# Altium PCB uku20710_proc.PcbDoc (part 3 of 3)
Units mm, origin at the board's own origin, x right, y up, seen from the top; angles counter-clockwise.
Board outline 354.7 x 156.7 mm, 4 copper layers (Top Layer, MidLayer1, MidLayer2, Bottom Layer); 269 components, 535 nets, 989 pads, 584 vias.
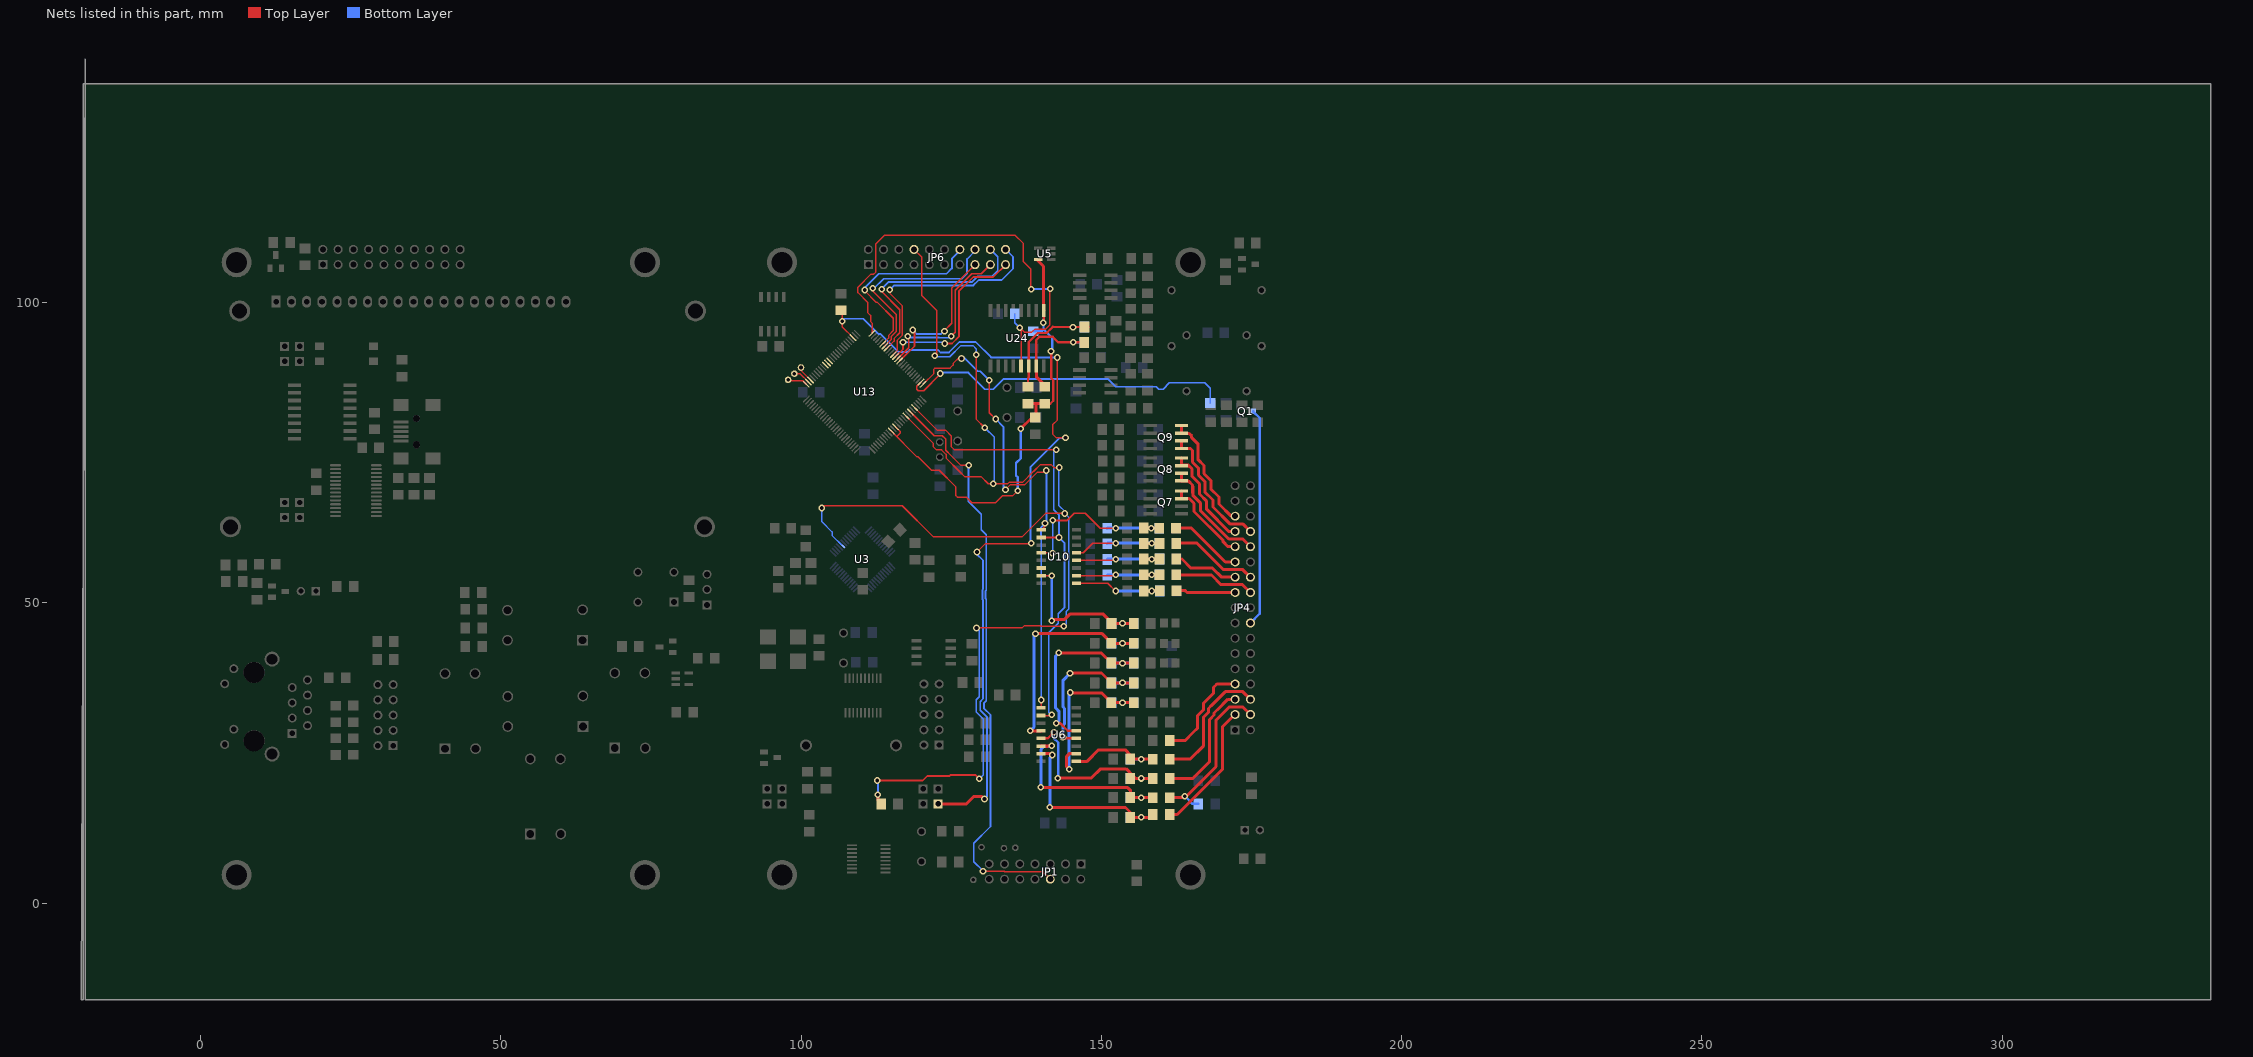
[diagram p3: the nets of this part, all layers, seen from the top]

## Via types
v1: diameter 1.1, hole 0.6, Top Layer to Bottom Layer, 508 vias
v2: diameter 1.2, hole 0.7, Top Layer to Bottom Layer, 56 vias
v3: diameter 1.5, hole 1, Top Layer to Bottom Layer, 16 vias
v4: diameter 1.27, hole 0.711, Top Layer to Bottom Layer, 2 vias
v5: diameter 1.2, hole 0.6, Top Layer to Bottom Layer, 1 vias
v6: diameter 1.1, hole 0.7, Top Layer to Bottom Layer, 1 vias

## Nets (pads, with @x,y where several pads share a name; then routed paths per layer and width w, separated by ;. In a path a pad name is that pad's centre, name@x,y a point inside that pad or via, vN(x,y) a via of type N, cw(c..) or ccw(c..) an arc to the next point about the centre after c; other vN are vias at no path point) (continued)
P1_23: JP6.15 U13.37 | length 25.4
  Top Layer w0.25: v1@123.774,95.25 123.799,95.275 125.074,96.55 125.074,96.65
  Top Layer w0.3: U13.37@116.408,90.276 118.874,92.743 118.874,95.25 118.652,95.472 v1@118.524,95.6 ; 125.074,96.65 125.074,102.42 JP6.15@128.954,106.3
  Bottom Layer w0.3: v1@118.524,95.6 v1@118.574,95.55 ; v1@118.574,95.4 118.577,95.397 119.224,94.75 123.274,94.75 v1@123.774,95.25
  other v1: 123.874,95.2 118.603,95.423
P1_24: JP6.17 U13.38 | length 27
  Top Layer w0.25: v1(124.974,94.35) 125.674,95.05 125.674,95.85
  Top Layer w0.3: U13.38@116.055,90.63 117.924,92.5 v1@117.924,94.15 ; 125.674,95.85 125.674,102.05 128.424,104.8 129.994,104.8 JP6.17@131.494,106.3
  Bottom Layer w0.25: 122.974,94.15 124.774,94.15 v1(124.974,94.35)
  Bottom Layer w0.3: v1@117.924,94.15 122.974,94.15
  other v1: 117.752,94.373
P1_25: 
P1_25: 
P1_25: 
P1_25: 
P1_25: 
P1_25: JP6.19 U13.39 | length 29.9
  Top Layer w0.3: U13.39@115.701,90.984 116.974,92.257 v1(116.952,93.372) ; v1(123.904,93.172) 125.124,93.172 126.274,94.323 126.274,101.85 128.674,104.25 131.984,104.25 JP6.19@134.034,106.3
  Bottom Layer w0.3: v1(116.952,93.372) 123.704,93.372 v1(123.904,93.172)
P1_26: JP6.20 U13.40 | length 38
  Top Layer w0.25: v1(114.774,102.15) 114.774,101.5 116.874,99.4 116.874,94.6 116.024,93.75 116.024,92.014 U13.40@115.347,91.337
  Bottom Layer w0.3: v1(114.774,102.15) 115.474,102.85 128.674,102.85 129.574,103.75 133.374,103.75 135.274,105.65 135.274,107.6 JP6.20@134.034,108.84
P1_27: JP6.18 U13.43 | length 36.9
  Top Layer w0.25: v1@113.324,101.9 116.424,98.8 116.424,94.95 115.474,94 115.474,93.586 U13.43@114.287,92.398 ; U13.43@114.124,92.25 U13.43@114.28,92.405
  Bottom Layer w0.3: v1@113.324,101.9 113.324,102.176 113.324,102.2 113.351,102.227 114.524,103.4 128.424,103.4 129.374,104.35 131.774,104.35 132.724,105.3 132.724,107.61 JP6.18@131.494,108.84
  other v1: 113.403,102.176
P1_28: JP6.16 U13.44 | length 33.2
  Top Layer w0.25: v1@111.874,102.1 111.874,101.95 115.874,97.95 115.874,95.2 115.804,95.13 115.804,95.122 115.002,94.319 115.002,93.82 U13.44@113.933,92.751
  Bottom Layer w0.3: v1@111.874,102.1 112.05,102.276 113.724,103.95 126.724,103.95 127.624,104.85 127.624,107.25 128.954,108.58 JP6.16@128.954,108.84
  other v1: 111.951,102.375
P1_29: 
P1_29: 
P1_29: 
P1_29: 
P1_29: JP6.14 U13.45 | length 31.9
  Top Layer w0.25: v1@110.3,102.375 110.3,102.225 110.526,102 112.501,100.024 112.701,100.024 115.352,97.373 115.352,95.323 114.552,94.523 114.552,94.077 U13.45@113.58,93.105
  Bottom Layer w0.3: v1@110.501,102.375 112.901,104.775 124.204,104.775 125.104,105.675 125.104,107.276 126.414,108.586 JP6.14@126.414,108.84
  other v1: 110.601,102.075
P1_30: U6.10 U10.10 U13.21 | length 78.8
  Top Layer w0.25: U13.21@118.883,82.498 122.631,78.75 124.024,78.75 124.974,77.8 124.974,76 125.474,75.5 v1(142.474,75.5) ; U6.10@139.954,31.218 139.972,31.2 141.702,31.2 v1@141.76,31.258
  Top Layer w0.3: U10.10@139.999,60.875 v1@142.95,60.875
  Bottom Layer w0.3: v1@141.76,31.258 141.224,31.793 141.224,44.976 142.81,46.562 142.81,48.198 143.874,49.262 143.874,59.901 v1@142.96,60.815 ; v1(142.474,75.5) 142.074,75.1 142.074,65.502 142.924,64.652 v1@142.924,60.815
  other v1: 141.76,31.358 142.935,60.875
P1_31: R22.1 U13.20 | length 108.1
  Top Layer w0.25: U13.20@118.529,82.145 122.405,78.27 123.755,78.27 124.505,77.519 124.505,75.769 125.557,74.718 127.832,74.718 v1(128.032,74.518)
  Top Layer w0.3: R22.1@104.133,19.042 109.666,19.042 112.129,21.505 120.43,21.505 120.68,21.755 124.481,21.755 124.631,21.906 131.933,21.906 132.183,21.655 ; v1(131.357,32.908) 133.358,30.908 v1(136.508,30.908) ; 132.183,21.655 133.457,20.381 v1(135.934,20.381)
  Bottom Layer w0.3: v1(128.032,74.518) 128.882,73.667 128.882,72.443 128.406,71.967 128.406,67.217 130.657,64.966 130.657,62.516 131.357,61.815 131.357,51.963 131.157,51.763 131.157,50.913 131.357,50.713 v1(131.357,32.908) ; v1(135.934,20.381) 136.558,21.005 136.558,22.706 135.958,23.306 135.958,30.358 v1(136.508,30.908)
P1_31: 
P1_31: 
P1_31: 
P1_31: 
P1_31: 
P1_31: 
P1_31: 
P1_31: 
P1_31: 
P1_31: 
P1_31: 
P1_31: 
P1_31: 
P2_0: U13.75 X13.1 | length 3.3
  Top Layer w0.25: X13.1@97.825,87.121 97.975,86.971 100.268,86.971 U13.75@100.852,86.387
P2_1: U13.74 X14.1 | length 2.9
  Top Layer w0.25: X14.1@98.875,88.15 99.797,88.15 U13.74@101.205,86.741
P2_2: U13.73 X15.1 | length 2.7
  Top Layer w0.25: X15.1@99.971,89.171 99.972,88.682 U13.73@101.559,87.095
P2_7: U13.66
P2_8: U13.65
P2_9: U13.64
P2_10: R9.2 U13.53 X20.1 | length 142.3
  Top Layer w0.25: R9.2@106.7,98.724 106.874,98.549 v1(106.874,96.9) 106.824,96.85 106.824,95.971 U13.53@108.63,94.166 ; v1(129.274,58.45) 130.624,59.8 v1@138.274,59.8 ; v1(142.674,90.85) 142.674,80.45 141.874,79.65 141.874,78.1 142.524,77.45 v1(144.024,77.45)
  Top Layer w0.5: X20.1@122.822,16.5 127.502,16.5 128.706,17.704 130.107,17.704 v2(130.507,17.304)
  Bottom Layer w0.3: v1(106.874,96.9) 107.274,97.3 110.324,97.3 112.851,94.773 113.201,94.773 116.202,91.772 117.752,91.772 118.052,92.072 122.804,92.072 123.204,91.672 124.604,91.672 126.355,93.422 129.055,93.422 131.628,90.85 v1(142.674,90.85) ; v1(129.274,58.45) 129.274,58.05 130.274,57.05 130.274,52.238 130.197,52.161 130.197,50.515 130.274,50.438 130.274,34 129.824,33.55 129.824,32.1 130.924,31 130.924,17.722 v2(130.507,17.304) ; v1@138.274,59.8 138.174,59.9 138.174,72.55 143.074,77.45 v1(144.024,77.45)
  other v1: 138.309,59.915
P2_13: R97.1 U13.50 U24.5 | length 74.9
  Top Layer w0.25: U13.50@111.812,94.873 111.812,96.565 111.552,96.824 111.552,97.847 111.124,98.275 111.124,99.975 109.452,101.648 109.452,102.55 111.628,104.726 112.102,104.726 112.452,105.076 112.452,109.778 113.853,111.178 135.658,111.178 137.009,109.828 137.009,106.777 138.259,105.526 v1@138.259,102.276 ; v1(136.408,95.824) v1@136.609,95.623 ; U24.5@136.609,89.425 v1@136.609,95.623 ; v1(141.46,102.276) 141.36,102.176 141.36,96.224 140.659,95.524 138.859,95.524 138.409,95.074 137.159,95.074 v1@136.609,95.623
  Bottom Layer w0.3: R97.1@135.57,98.118 135.57,96.662 v1(136.408,95.824) ; v1(138.309,102.226) v1@141.41,102.226
P3_25: R84.1 U13.27 | length 57.5
  Top Layer w0.25: U13.27@119.944,86.741 119.254,86.051 119.254,85.571 119.504,85.321 120.404,85.321 123.155,88.072 v1(123.155,88.172)
  Bottom Layer w0.3: v1(123.155,88.172) 123.305,88.322 127.856,88.322 130.607,85.571 132.007,85.571 133.708,87.272 151.062,87.272 152.362,85.972 159.164,85.972 159.564,85.571 160.264,85.571 161.315,86.622 167.216,86.622 168.113,85.725 R84.1@168.113,83.268
P3_26: U6.9 U10.9 U13.26 | length 84.3
  Top Layer w0.25: U13.26@120.297,86.387 122.103,88.194 122.103,88.921 122.253,89.071 124.804,89.071 125.304,89.571 125.304,89.821 126.355,90.872 126.705,90.872 v1@126.905,90.872 ; v1(131.324,87.05) 131.324,81.65 v1(132.374,80.6) ; v1@133.89,68.85 v1(134.024,68.85) 134.791,69.616 137.185,69.616 139.335,71.767 v1@140.835,71.767 ; U6.9@139.954,32.488 139.954,33.48 v1@139.974,33.5 ; U10.9@139.999,62.145 140.609,62.755 v1(140.609,63.216)
  Bottom Layer w0.3: v1@126.905,90.872 127.053,90.872 129.374,88.55 129.824,88.55 v1(131.324,87.05) ; v1(132.374,80.6) 133.674,79.3 133.674,69.05 133.949,68.775 v1@134.074,68.65 ; 139.959,61.315 139.959,62.566 140.835,63.442 v1@140.835,71.767 ; v1@139.974,33.5 139.974,33.808 139.974,61.9
  other v1: 140.009,33.808 140.835,72.017 126.705,90.672
PB1: 
PB1: 
PB2: 
PB2: 
PB3: 
PB3: 
PE6: 
PE6: 
PE7: 
PQ3: 
PQ4: 
PQ5: 
PQ6: 
PROG0: 
PROG1: 
PROG1: 
PROG1: 
PWM1: 
PWM2: 
REL1: JP4.24 Q7.5 Q7.6 | length 17.1
  Top Layer w0.5: Q7.6@163.336,66.07 Q7.5@163.336,64.8 163.336,64.788 Q7.5@164.236,64.788 ; Q7.5@163.824,64.9 163.824,64.85 164.624,64.85 169.374,60.1 169.374,59.25 170.574,58.05 173.554,58.05 JP4.24@174.814,56.79
REL1: 
REL2: JP4.25 Q7.7 Q7.8 | length 14.4
  Top Layer w0.5: Q7.8@163.336,68.61 Q7.7@163.336,67.34 163.348,67.35 164.624,67.35 165.424,66.55 165.424,65.2 170.274,60.35 170.274,60.15 171.094,59.33 JP4.25@172.274,59.33
REL3: JP4.26 Q8.5 Q8.6 | length 20.1
  Top Layer w0.5: Q8.6@163.324,71.565 Q8.5@163.324,70.295 163.327,70.297 163.374,70.25 164.524,70.25 165.174,69.6 165.174,68.3 ; 165.224,69.4 165.224,67.9 166.474,66.65 166.474,65.35 171.224,60.6 173.544,60.6 JP4.26@174.814,59.33
REL4: JP4.27 Q8.7 Q8.8 | length 17.3
  Top Layer w0.5: Q8.8@163.324,74.105 Q8.7@163.324,72.835 163.389,72.9 164.474,72.9 165.074,72.3 165.074,71.05 166.324,69.8 166.324,68.1 167.524,66.9 167.524,65.55 171.204,61.87 JP4.27@172.274,61.87
REL5: JP4.28 Q9.5 Q9.6 | length 22
  Top Layer w0.5: Q9.5@163.324,75.695 Q9.5@163.324,75.7 ; Q9.6@163.324,76.965 Q9.5@163.324,75.7 ; JP4.28@174.814,61.87 173.534,63.15 171.374,63.15 168.574,65.95 168.574,67.1 167.224,68.45 167.224,70.2 166.174,71.25 166.174,72.4 165.174,73.4 165.174,75.35 164.824,75.7 Q9.5@163.324,75.7
REL6: JP4.29 Q9.7 Q9.8 | length 20
  Top Layer w0.5: Q9.8@163.324,79.505 Q9.7@163.324,78.235 163.317,78.242 163.274,78.2 163.324,78.2 164.624,78.2 165.024,77.8 165.024,77.5 166.124,76.4 166.124,73.8 167.074,72.85 167.074,71.5 168.224,70.35 168.224,68.95 169.574,67.6 169.574,66.45 171.614,64.41 JP4.29@172.274,64.41
REL7: JP4.16 Q1.3 | length 36.3
  Bottom Layer w0.4: JP4.16@174.814,46.63 176.368,48.184 176.368,80.77 Q1.3@175.268,81.871
RES: D1.1 JP6.8 U3.29 U13.17 | length 225.8
  Top Layer w0.25: v1(103.452,65.785) 103.852,66.185 ; v1@103.814,66.147 116.822,66.147 121.955,61.015 136.84,61.015 140.691,64.866 v1@143.96,64.866 ; U13.17@117.469,81.084 122.024,76.528 122.024,75.95 122.524,75.45 123.374,75.45 124.124,74.7 124.124,74.1 126.337,71.888 127.207,71.018 129.939,71.018 131.14,69.817 v1(131.957,69.817) ; JP6.8@118.794,108.84 120.074,107.56 120.074,101.15 122.574,98.65 v1@122.574,91.25 ; v1(129.124,91.3) 129.124,80.6 v1(130.574,79.15) ; v2(129.207,45.8) v2@129.307,45.8 ; v2@129.318,45.811 130.407,45.811 ; 130.407,45.8 136.774,45.8 137.174,46.2 139.824,46.2 139.974,46.05 v1@143.76,46.05 ; v1@131.774,69.8 134.366,69.8 134.613,70.046 136.856,70.046 138.731,71.921 ; 138.735,71.917 139.834,73.016 141.587,73.016 142.085,72.518 v1(143.01,72.518)
  Top Layer w0.3: v1(112.678,20.404) 120.229,20.404 120.98,21.155 124.731,21.155 124.88,21.304 129.083,21.304 v1(129.683,20.704)
  Top Layer w0.5: v1(112.778,18.053) 112.778,17.067 D1.1@113.334,16.512
  Bottom Layer w0.25: v1(103.452,65.785) 103.452,63.485 105.152,61.785 105.152,61.223 U3.29@106.731,59.644 ; v1(122.253,91.122) 122.404,90.972 124.754,90.972 126.605,92.822 128.605,92.822 129.124,92.303 v1(129.124,91.3) v1@129.074,91.25 ; v2(129.207,45.8) 129.657,45.35 129.657,34.359 129.157,33.858 129.157,31.808 130.307,30.658 130.307,21.804 130.307,21.328 v1(129.683,20.704) ; v1(130.574,79.15) 132.174,77.55 132.174,69.95 v1@132.024,69.8 ; 142.924,66.167 142.924,72.433 v1(143.01,72.518) ; 142.96,66.167 143.924,65.202 v1(143.924,64.866) 144.524,64.266 144.524,48.926 144.11,48.512 144.11,46.412 v1(143.76,46.061)
  Bottom Layer w0.3: v1(112.678,20.404) 112.778,20.304 v1(112.778,18.053)
RX: 
RXCAN: 
SK1: JP4.23 R43.1 | length 12.2
  Top Layer w0.5: R43.1@162.434,62.416 R43.1@162.427,62.422 165.009,62.422 170.641,56.79 JP4.23@172.274,56.79
SK2: JP4.22 R45.1 | length 14.7
  Top Layer w0.5: R45.1@162.465,59.915 165.916,59.915 170.317,55.514 173.551,55.514 JP4.22@174.814,54.25
SK3: JP4.21 R49.1 | length 11
  Top Layer w0.5: R49.1@162.477,57.271 163.409,57.271 164.916,55.764 168.516,55.764 170.03,54.25 JP4.21@172.274,54.25
SK4: JP4.20 R51.1 | length 13.6
  Top Layer w0.5: R51.1@162.465,54.614 168.316,54.614 169.917,53.013 173.511,53.013 JP4.20@174.814,51.71
T3: 
T3: 
TD1: 
TX: 
U2: U10.14
U5: 
U6: 
U7: 
U8: 
UAKB: 
UB1: JP4.3 R25.2 | length 21.9
  Top Layer w0.5: R25.2@161.362,14.746 162.62,14.746 170.124,22.25 170.124,29.3 172.214,31.39 JP4.3@172.274,31.39
UB2: JP4.5 R29.2 | length 20.7
  Top Layer w0.5: R29.2@161.362,20.743 165.218,20.743 168.024,23.55 168.024,30.566 168.767,31.308 168.767,31.658 169.317,32.208 ; 169.325,32.2 171.054,33.93 JP4.5@172.274,33.93
UBM1: JP4.4 R27.2 R102.1 | length 27.6
  Top Layer w0.5: R27.2@161.362,17.543 163.918,17.543 169.074,22.7 169.074,30.45 171.274,32.65 173.554,32.65 JP4.4@174.814,31.39
  Bottom Layer w0.4: v1(163.871,17.804) 165.165,16.511 R102.1@166.13,16.511
UBM2: JP4.6 R33.2 | length 21.8
  Top Layer w0.5: R33.2@161.362,23.943 164.768,23.943 167.024,26.2 167.024,30.966 167.816,31.758 167.816,32.408 168.266,32.858 ; 168.274,32.85 170.624,35.2 173.544,35.2 JP4.6@174.814,33.93
UIB1: C65.2 R122.2 R126.1 U24.7 | length 19
  Top Layer w0.4: U24.7@139.149,89.271 U24.7@139.149,89.425 139.149,93.764 139.658,94.273 141.908,94.273 142.824,93.357 v1(145.311,93.357) R122.2@147.137,93.357
  Top Layer w0.5: U24.7@139.149,89.425 139.149,87.625 140.568,86.207 R126.1@140.568,85.962
  Bottom Layer w0.4: v1(145.311,93.357) 145.327,93.373 147.172,93.373 C65.2@147.211,93.373
UIB2: C16.2 R62.2 R66.1 U24.6 | length 21
  Top Layer w0.4: R66.1@137.768,85.962 137.768,87.393 137.879,87.505 U24.6@137.879,89.425 137.879,93.394 139.408,94.923 140.858,94.923 141.408,95.473 ; 141.428,95.453 141.924,95.95 145.261,95.924 147.187,95.903 147.771,95.903 R62.2@147.824,95.85
  Bottom Layer w0.4: v1@145.261,95.924 C16.2@147.122,95.903 C16.2@147.722,95.903
  other v1: 145.261,95.874
ULOAD: JP4.19 R36.2 | length 9.9
  Top Layer w0.5: R36.2@162.502,52.006 163.972,52.006 164.268,51.71 JP4.19@172.274,51.71
US: JP4.7 R41.2 | length 17.3
  Top Layer w0.5: R41.2@161.362,27.043 163.918,27.043 165.253,28.378 166.024,29.15 166.024,31.216 166.966,32.158 166.966,33.208 168.666,34.909 168.666,35.909 168.992,36.234 169.228,36.47 JP4.7@172.274,36.47 ; 168.967,36.259 168.972,36.254 168.972,36.214
US1: 
US1: 
US1: 
US1: 
US1: 
US1: 
US1: 
US1: 
US1: 
UU1: C4.1 R24.1 R25.1 U6.15 | length 31.9
  Top Layer w0.5: U6.15@139.954,24.868 139.924,24.9 139.954,24.9 141.566,24.9 v1(141.81,24.656) ; v1(141.424,15.95) 141.474,15.9 154.017,15.9 154.763,15.154 154.763,14.257 154.763,14.243 154.787,14.243 156.663,14.243 v1@157.112,14.243 ; v1@156.363,14.203 156.663,14.203 158.02,14.203 R25.1@158.562,14.746
  Bottom Layer w0.4: C4.1@154.772,14.25 C4.1@155.374,14.25 ; C4.1@155.263,14.203 v1@156.36,14.203
  Bottom Layer w0.5: v1(141.424,15.95) 141.424,24.271 v1(141.81,24.656)
  other v1: 156.663,14.253
UU2: C5.1 R26.1 R27.1 U6.14 | length 33.6
  Top Layer w0.5: v1(139.924,19.25) 139.974,19.2 154.368,19.2 154.863,18.705 154.863,17.557 154.863,17.554 154.874,17.543 156.663,17.543 R27.1@158.562,17.543 ; 141.024,26.1 139.992,26.1 U6.14@139.954,26.138 141.641,26.138 v1(141.71,26.206)
  Bottom Layer w0.4: C5.1@154.772,17.552 155.272,17.552 C5.1@155.274,17.55
  Bottom Layer w0.5: v1(139.924,19.25) 139.924,25.6 140.424,26.1 141.603,26.1 v1(141.71,26.206) ; C5.1@154.863,17.552 155.272,17.552 156.661,17.552 v1(156.663,17.55)
UU3: C6.1 R28.1 R29.1 U6.13 | length 30
  Top Layer w0.4: U6.13@139.954,27.408 141.061,27.408 v1(142.11,28.457)
  Top Layer w0.5: v1(142.724,20.8) 148.324,20.8 149.874,22.35 154.118,22.35 155.249,21.219 155.725,20.743 v1(156.663,20.743) R29.1@158.562,20.743
  Bottom Layer w0.4: v1(142.11,28.457) 142.11,27.407 142.81,26.707 142.81,20.886 v1(142.724,20.8) ; C6.1@154.772,20.75 155.224,20.75 C6.1@155.23,20.755 ; C6.1@154.963,20.755 C6.1@155.23,20.755 ; C6.1@155.274,20.8 C6.1@155.23,20.755 ; v1@156.66,20.755 C6.1@155.23,20.755
  Bottom Layer w0.5: v1@142.674,20.85 v1(142.724,20.8)
UU4: C7.1 R32.1 R33.1 U6.1 | length 17.4
  Top Layer w0.5: U6.1@145.804,23.598 145.804,23.6 147.624,23.6 149.524,25.5 153.969,25.5 R32.1@154.813,24.656 ; R32.1@154.963,23.956 156.657,23.956 v1(156.663,23.95) ; R32.1@155.018,24.188 R32.1@155.107,24.1 ; v1@156.663,23.943 R33.1@158.562,23.943
  Bottom Layer w0.4: C7.1@154.772,23.95 C7.1@155.274,23.95 ; C7.1@154.787,23.957 156.657,23.957 v1(156.663,23.95) ; C7.1@155.213,23.956 v1@156.31,23.956
UU5: C9.1 D6.2 R47.2 R48.2 U6.2 | length 33
  Top Layer w0.5: v1(144.66,22.255) 144.21,22.706 144.21,24.436 144.624,24.85 144.642,24.868 U6.2@145.804,24.868 ; v1(144.824,35.05) 144.874,35 150.005,35 R48.2@151.662,33.343 151.675,33.357 v1(153.513,33.357) R47.2@155.37,33.359
  Bottom Layer w0.5: v1@144.624,22.255 144.624,34.85 v1(144.824,35.05) ; C9.1@151.675,33.35 151.681,33.357 v1(153.513,33.357) D6.2@155.37,33.359 154.37,33.359
UU6: C10.1 D7.2 R54.2 R55.2 U6.4 | length 29.6
  Top Layer w0.4: v5@143.61,27.657 143.61,27.607 143.809,27.408 U6.4@145.804,27.408
  Top Layer w0.5: v1(144.774,38.25) 144.824,38.3 150.005,38.3 R55.2@151.662,36.643 151.675,36.657 153.513,36.657 R54.2@155.37,36.659
  Bottom Layer w0.5: v5@143.624,27.657 143.624,29.607 143.86,29.843 143.86,32.408 143.624,32.644 143.624,37.1 v1(144.774,38.25) ; C10.1@151.662,36.643 151.672,36.644 151.675,36.644 151.774,36.65 v1(153.513,36.65) D7.2@155.37,36.659 154.37,36.659
  other v5: 143.56,27.657
UU7: C13.1 D8.2 R58.2 R59.2 U6.5 | length 34.1
  Top Layer w0.4: v1(142.51,29.957) 143.11,29.957 144.39,28.678 U6.5@145.804,28.678
  Top Layer w0.5: v1(142.874,41.65) 142.924,41.6 150.019,41.6 R59.2@151.669,39.95 ; 154.387,39.957 155.374,39.95 v1(153.513,39.95) R59.2@151.669,39.95 ; R59.2@151.669,39.95 R59.2@151.662,39.943 R59.2@151.669,39.95
  Bottom Layer w0.5: v1(142.51,29.957) 142.96,30.408 142.96,31.872 142.374,32.458 142.374,41.15 v1(142.874,41.65) ; C13.1@151.679,39.952 151.681,39.95 v1(153.513,39.95) D8.2@155.374,39.95
UU8: C24.1 D9.2 R68.2 R70.2 U6.12 | length 40.2
  Top Layer w0.5: v1(138.159,28.657) 139.926,28.657 U6.12@139.947,28.678 ; v1(139.024,44.85) 150.124,44.85 151.697,43.278 151.724,43.25 R70.2@151.679,43.252 ; U6.12@139.924,28.7 U6.12@139.947,28.678 ; U6.12@139.954,28.678 U6.12@139.947,28.678 ; R70.2@151.662,43.243 153.018,43.243 153.024,43.25 v1(153.513,43.25) 155.374,43.25 154.387,43.257
  Bottom Layer w0.5: v1(138.159,28.657) 138.774,29.273 138.774,44.6 v1(139.024,44.85) ; C24.1@151.679,43.252 151.681,43.25 v1(153.513,43.25) D9.2@155.363,43.261
UU9: C8.1 R35.1 R36.1 U10.1 | length 17.1
  Top Layer w0.25: U10.1@145.849,53.255 151.07,53.255 v1(152.362,51.963)
  Top Layer w0.5: R35.1@157.076,51.92 157.119,51.963 v1(158.414,51.963) 158.457,52.006 R36.1@159.702,52.006
  Bottom Layer w0.5: v1(152.362,51.963) 152.366,51.96 C8.1@159.717,51.96 ; v1@158.414,51.96 v1(158.414,51.963)
UU10: 
UU10: C40.1 D13.2 R51.2 R111.2 U10.2 | length 17.6
  Top Layer w0.3: U10.2@145.911,54.514 152.212,54.514 v1(152.362,54.664)
  Top Layer w0.5: D13.2@157.07,54.67 157.064,54.664 R51.2@159.614,54.664
  Bottom Layer w0.5: R111.2@151.012,54.664 C40.1@159.564,54.664
  other v1: 158.364,54.664
UU11: C38.1 D4.2 R49.2 R118.2 U10.4 | length 18
  Top Layer w0.3: U10.4@145.849,57.065 145.85,57.064 152.162,57.064 v1(152.362,57.264)
  Top Layer w0.5: D4.2@157.068,57.273 R49.2@159.705,57.273 ; v1(158.364,57.264) v1@158.364,57.273
  Bottom Layer w0.5: R118.2@150.962,57.221 151.005,57.264 C38.1@159.664,57.264
UU12: C39.1 D12.2 R45.2 R129.2 U10.5 | length 18.6
  Top Layer w0.3: U10.5@145.849,58.335 146.982,58.335 148.561,59.915 v1(152.362,59.915)
  Top Layer w0.5: D12.2@157.068,59.874 159.605,59.874 R45.2@159.664,59.815 ; v1@158.364,59.874 v1(158.364,59.915)
  Bottom Layer w0.5: R129.2@150.962,59.865 151.012,59.915 C39.1@159.664,59.915
UU13: C37.1 D3.2 R43.2 R128.2 U10.12 | length 29.9
  Top Layer w0.3: U10.12@139.999,58.335 141.789,58.335 v1(141.86,58.265) ; v1(141.91,63.716) 144.287,63.716 145.487,64.915 147.312,64.915 149.805,62.422 v1(152.362,62.422)
  Top Layer w0.5: D3.2@157.12,62.422 R43.2@159.627,62.422
  Bottom Layer w0.3: v1(141.86,58.265) 141.91,58.315 v1(141.91,63.716)
  Bottom Layer w0.5: R128.2@150.962,62.407 150.977,62.422 C37.1@159.007,62.422
  other v1: 158.314,62.422
UU14: C26.1 D10.2 R75.2 R76.2 U10.15 | length 27.7
  Top Layer w0.25: U10.15@139.999,54.525 141.698,54.525 v1(141.724,54.499)
  Top Layer w0.5: v1(141.724,47) 141.974,47.25 143.886,47.25 144.736,48.1 150.324,48.1 151.774,46.65 151.865,46.559 153.024,46.559 153.033,46.55 153.513,46.55 R75.2@155.37,46.559
  Bottom Layer w0.4: v1(141.724,47) v1(141.724,54.499)
  Bottom Layer w0.5: C26.1@151.675,46.55 151.683,46.559 v1(153.513,46.559) D10.2@155.37,46.559
VBAT: JP1.6 U13.19 | length 97.7
  Top Layer w0.25: U13.19@118.176,81.791 122.148,77.819 123.505,77.819 124.074,77.25 124.074,75.4 124.976,74.499 126.557,72.917 v1(127.932,72.917) ; v1(130.274,5.3) 133.809,5.3 133.908,5.201 140.24,5.201 JP1.6@141.481,3.96
  Bottom Layer w0.3: v1(127.932,72.917) 127.856,72.841 127.856,66.914 130.005,64.765 130.005,62.164 130.824,61.345 130.824,52.109 130.677,51.962 130.677,50.714 130.824,50.566 130.824,33.7 130.424,33.3 130.424,32.45 131.524,31.35 131.524,12.743 128.732,9.951 128.732,6.892 130.274,5.35 v1(130.274,5.3)
VREF: C20.2 C25.2 R66.2 R126.2 U5.5 U13.10 U13.12 U24.9 | length 77.6
  Top Layer w0.25: U13.10@114.994,78.609 119.308,74.296 119.493,74.296 121.721,72.068 123.006,72.068 125.724,69.35 125.724,67.9 126.024,67.6 127.474,67.6 128.424,66.65 132.374,66.65 133.574,67.85 135.274,67.85 v1(136.074,68.65) ; U13.12@115.701,79.316 116.524,78.493 116.524,78.3 115.924,77.7
  Top Layer w0.4: R66.2@137.724,83.15 137.737,83.162 R66.2@137.768,83.162 R66.2@137.774,83.162 ; U24.9@140.419,98.675 140.419,97.155 140.424,97.15 ; R126.2@140.624,83.15 141.474,83.15 141.974,83.65 141.974,87.05 141.674,87.35 141.674,91.873 v1@141.674,91.95
  Top Layer w0.5: v1(136.574,79) 138.427,80.853 C25.2@138.971,80.853 ; R66.2@137.774,83.1 137.802,83.128 137.837,83.162 139.024,83.162 ; C25.2@139.074,80.8 139.074,80.853 139.074,83.112 139.024,83.162 ; U5.5@139.249,107.15 139.366,107.033 140.374,106.025 140.374,98.675 140.374,98.65 140.394,98.65 U24.9@140.419,98.675 ; R126.2@140.568,83.162 139.024,83.162
  Bottom Layer w0.3: 140.324,97.25 140.424,97.15
  Bottom Layer w0.4: v1(136.074,68.65) 136.074,70.9 135.774,71.2 135.774,73.25 136.574,74.05 v1(136.574,79) ; C20.2@138.662,95.206 140.091,95.206 140.384,95.499 ; v1@140.359,96.624 140.359,96.6 140.359,95.524 140.384,95.499 ; 140.409,95.524 140.384,95.499 ; v1@140.424,96.6 140.424,97.15 ; v1@141.674,91.95 141.81,92.085 141.81,94.074 140.384,95.499
  other v1: 141.61,91.873 140.324,96.6
VS: JP4.8 R71.2 | length 19
  Top Layer w0.5: R71.2@161.362,30.143 163.868,30.143 166.17,32.445 166.17,34.012 167.466,35.309 167.466,36.959 168.257,37.75 173.534,37.75 JP4.8@174.814,36.47
VS: 
pads on no net: C1_1.1 C1_1.2 C2_1.1 C2_1.2 C3_1.1 C3_1.2 C4_1.1 C4_1.2 C5_1.1 C5_1.2 C22_1.1 C22_1.2 C303.1 C303.2 D1_1.1 D1_1.2 D3_1.1 D3_1.2 DS1.1 DS1.2 J1.0 J1.1 J1.2 J1.3 J1.4 J1.5 J1.6 J301.0 J301.1 J301.2 J301.3 J301.4 J301.5 J301.6 J301.7 J301.8 J301.9 J301.10 J301.11 J301.12 JP1_1.1 JP1_1.2 JP1_1.3 JP1_1.4 JP1_1.5 JP1_1.6 JP1_1.7 JP1_1.8 JP1_1.9 JP1_1.10 JP2.9 JP2.10 JP4.30 JP5.1 JP5.2 JP5.3 JP5.4 JP5.5 JP5.6 JP5.7 JP5.8 JP5.9 JP5.10 JP5.11 JP5.12 JP5.13 JP5.14 JP5.15 JP5.16 JP5.17 JP5.18 JP5.19 JP5.20 JP6.10 JP9.1 JP9.2 JP9.3 Q1_1.1 Q1_1.2 Q1_1.3 Q3.1 Q3.2 Q3.3 Q5.1 Q5.2 Q5.3 R1_1.1 R1_1.2 R2.1 R2.2 R3.1 R3.2 R4.1 R4.2 R5.1 R5.2 R6.1 R6.2 R7.1 R7.2 R8.1 R8.2 R9_1.1 R9_1.2 R10_1.1 R10_1.2 R11.1 R11.2 R12_1.1 R12_1.2 R13_1.1 R13_1.2 R21.1 R21.2 R301.1 R301.2 R302.1 R302.2 R303.1 R303.2 R304.1 R304.2 R305.1 R305.2 R306.1 R306.2 S1.1 S1.2 S2.1 S2.2 S3.1 S3.2 S4.1 S4.2 S5.1 S5.2 S6.1 S6.2 U1.7 U1.11 U1_1.1 U1_1.2 U1_1.3 U1_1.4 U1_1.5 U1_1.6 U1_1.7 U1_1.8 U1_1.9 U1_1.10 U1_1.11 U1_1.12 U1_1.13 U1_1.14 U1_1.15 U1_1.16 U1_1.17 U1_1.18 U1_1.19 U1_1.20 U2.1 U2.5 U2.8 U2_1.1 U2_1.2 U2_1.3 U2_1.4 U2_1.5 U2_1.6 U2_1.7 U2_1.8 U2_1.9 U2_1.10 U2_1.11 U2_1.12 U2_1.13 U2_1.14 U2_1.15 U2_1.16 U2_1.17 U2_1.18 U2_1.19 U2_1.20 U2_1.21 U2_1.22 U2_1.23 U2_1.24 U2_1.25 U2_1.26 U2_1.27 U2_1.28 U3.1 U3.5 U3.6 U3.8 U3.9 U3.10 U3.11 U3.12 U3.25 U3.33 U3.38 U3.42 U3.45 U3.46 U3_1.1 U3_1.2 U3_1.3 U3_1.4 U3_1.5 U3_1.6 U3_1.7 U3_1.8 U3_1.9 U3_1.10 U3_1.11 U3_1.12 U3_1.13 U3_1.14 U3_1.15 U3_1.16 U4.3 U4.4 U4.5 U4.6 U4.7 U4.11 U4.12 U4.13 U4.15 U4_1.1 U4_1.2 U4_1.3 U4_1.4 U4_1.5 U5.4 U5_1.1 U5_1.2 U5_1.3 U5_1.4 U9.1 U9.5 U9.8 U10.13 U11.5 U12.1 U13.1 U13.2 U13.3 U13.4 U13.5 U13.6 U13.14 U13.51 U13.52 U13.56 U13.67 U13.68 U13.69 U13.70 U13.82 U13.85 U13.100 U24.12 X1.1 X2.1 X3.1 X4.1 X5.1 X6.1 X7.1 X8.1
copper on no net: | length 2050.8
  Top Layer w0.3: v2(1.675,101.425) 2.275,102.025 9.65,102.025 10.375,101.3 10.375,99.4 11.225,98.55 33.852,98.55 35.433,100.131 ; v2(1.925,47) 2.575,46.35 40.625,46.35 40.925,46.05 43.819,46.05 44.062,45.807 ; v1@2.3,49 v1(2.25,48.95) 2.25,48.662 3.851,47.062 41.91,47.062 43.861,49.012 44.011,49.012 ; v1(2.75,95.6) 8,95.6 9.8,97.4 37.782,97.4 40.513,100.131 ; v1(2.786,56.414) 2.801,56.4 4.114,56.4 4.15,56.364 ; v1(3.15,101.1) 3.5,101.45 9.275,101.45 9.85,100.875 9.85,99.15 11,98 35.842,98 37.973,100.131 ; 3.975,26.35 3.975,32.375 5.522,33.922 ; 4.002,36.508 v2(4.002,42.627) ; v1(4.001,48.462) 4.701,47.762 39.41,47.762 43.348,51.7 44,51.7 ; 4.201,53.5 4.201,53.542 4.201,53.564 6.931,56.294 6.945,56.294 ; v2(5.325,44.125) 5.175,43.975 3.45,43.975 1.875,42.4 1.875,25.8 3.075,24.6 4.4,24.6 5.522,25.722 5.522,28.938 ; 5.522,39.018 5.522,33.922 ; 7.05,53.463 9.3,53.463 9.36,53.403 9.43,53.333 9.963,52.8 11.894,52.8 11.953,52.8 ; 11.552,105.752 12.55,106.75 13.498,106.75 14.45,107.702 14.45,108.25 14.9,108.7 14.9,109 14.9,109.25 ; 14,90.2 13.453,89.653 13.453,81.82 14.138,81.135 15.63,81.135 ; 14,92.7 15.227,91.473 18.557,91.473 19.807,90.223 ; v2(15.004,76.269) 15.63,76.895 15.63,77.325 16.748,77.325 17.104,76.969 18.304,76.969 19.055,77.719 19.055,83.721 17.83,84.945 15.63,84.945 ; 15.252,28.263 17.459,26.056 29.368,26.056 29.518,26.206 ; 15.252,30.803 19.328,30.803 20.025,31.5 26.775,31.5 28.25,30.025 30.779,30.025 32.058,28.746 ; 15.252,33.343 14.673,33.922 5.522,33.922 ; 15.63,78.595 17.428,78.595 v2(17.904,78.12) ; 15.63,79.865 15.634,79.87 v2(17.954,79.87) ; 15.63,86.215 15.63,87.098 v2(15.854,87.322) 18.054,87.322 18.455,86.922 20.005,86.922 20.605,87.522 20.605,88.472 21.305,89.172 21.305,91.224 19.807,92.723 ; 15.654,82.371 v2(17.904,82.371) ; 16.5,90.2 18.578,88.122 v2(19.255,88.122) ; 17.802,34.613 26.361,34.613 v2(26.557,34.809) ; v2(18.555,23.256) 18.605,23.306 28.757,23.306 31.658,26.206 32.058,26.206 ; 19.255,71.568 20.255,71.568 20.875,70.948 23.436,70.948 23.906,71.418 25.006,71.418 26.106,70.318 26.106,67.167 27.525,65.748 29.261,65.748 ; 19.305,68.767 19.536,68.998 23.825,68.998 v2(24.356,68.467) ; 22.461,70.298 24.337,70.298 v2@24.356,70.318 ; 22.461,71.598 21.325,71.598 20.505,72.418 20.505,74.069 21.755,75.319 21.755,80.87 22.756,81.87 22.756,86.922 23.506,87.672 33.508,87.672 33.508,87.722 ; 22.461,72.248 21.475,72.248 21.055,72.668 21.055,73.818 22.456,75.219 22.456,79.92 23.671,81.135 24.88,81.135 ; 22.461,72.898 22.461,74.324 23.056,74.919 23.056,79.37 23.551,79.865 24.88,79.865 ; 22.499,32.87 22.505,32.87 ; 22.5,31.5 22.5,32.9 ; 22.506,26.056 22.512,26.05 22.512,24.644 ; 24.88,77.325 28.301,77.325 29.707,75.919 ; 24.88,82.405 25.991,82.405 v2(27.207,83.621) ; 24.88,84.945 28.833,84.945 v2@28.857,84.921 ; 25.4,24.669 25.4,23.312 25.406,23.306 ; 25.4,34.613 25.413,34.6 25.413,32.895 ; v2(26.4,41.4) 27.257,40.543 29.388,40.543 ; v2(26.7,43.7) 26.857,43.543 29.388,43.543 ; v2(27.057,90.223) 28.807,90.223 ; v2@27.557,71.218 v2(27.607,71.218) ; v2@27.707,68.367 27.726,68.348 29.261,68.348 ; 28.807,92.723 32.809,92.723 33.515,92.016 33.515,90.46 ; 28.957,78.87 29.857,78.87 31.858,76.869 33.358,76.869 v2(33.358,76.269) ; 29.207,71.618 28.007,71.618 v2(27.607,71.218) ; 29.261,64.448 36.491,64.448 38.109,66.067 38.109,67.967 ; 29.261,65.098 34.291,65.098 35.509,66.317 35.509,67.917 ; 29.261,66.398 30.926,66.398 v2@31.258,66.067 ; 29.261,67.698 32.69,67.698 32.958,67.967 ; 29.261,70.948 27.876,70.948 v2(27.607,71.218) ; 29.518,33.826 30.8,35.109 30.8,42.05 32.188,43.438 32.188,43.543 ; 29.695,75.812 30.823,74.684 31.058,74.449 31.058,67.717 ; v2@30.858,74.719 v2(31.258,75.119) ; 31.75,105.676 31.75,107.027 ; 32.058,33.826 33.925,35.694 33.925,38.825 32.197,40.553 32.175,40.575 ; 32.902,70.78 32.908,70.786 v2(32.908,71.618) ; 33.38,77.7 36.35,77.7 37.225,76.825 37.225,75.878 35.509,74.161 35.509,70.786 35.502,70.78 ; 33.38,78.5 35.625,78.5 v2(35.975,78.85) ; 34.25,105.476 34.25,106.968 34.259,106.977 ; 38.103,70.78 38.103,71.511 v2(38.109,71.518) ; v1(41.75,42.65) 41.807,42.707 44.062,42.707 ; v1(41.75,54) 64.4,54 67.1,56.7 81.7,56.7 v1(81.75,56.65) ; v1(68.35,42.9) 68.4,42.85 70.05,42.85 71.9,44.7 74.55,44.7 76.35,42.9 76.35,42.652 76.35,42.6 ; v1(68.4,47.9) 86.15,47.9 v1(87.2,48.95) ; 78.55,41.7 78.575,41.675 79.125,41.125 79.125,38.3 ; 78.6,43.65 78.625,43.625 78.7,43.55 v1(84.3,43.55) ; 78.602,41.702 78.648,41.702 ; v1@79.17,39.96 79.93,39.96 80.737,40.767 82.81,40.767 ; v1(81.15,34.75) 81.275,34.875 81.275,36.4 ; 81.25,38.35 81.275,38.325 81.275,38.3 82.25,38.3 83.25,37.3 83.25,34.65 82,33.4 82,31.757 82,31.75 82.003,31.747 82.8,30.95 v1(87,30.95)
  Top Layer w0.4: 9.36,53.403 9.711,53.755 9.711,56.429 ; v1(9.752,110.578) 11.472,110.578 12.075,109.975 12.1,109.95 12.155,109.895 ; 11.552,105.698 11.552,105.752 ; 14.094,51.87 16.611,51.87 16.681,51.939 16.704,51.963 ; 19.185,51.935 20.278,51.935 21.054,52.712 22.694,52.712 ; 25.494,52.712 38.659,52.712 41.11,55.164 64.216,55.164 66.652,57.6 80.635,57.6 80.9,57.864 86.15,57.864 v1(86.25,57.764) ; v1(31.75,103.45) 31.75,105.676 ; 31.75,107.027 31.75,107.54 33.05,108.84 ; v1(34.25,102.65) 34.25,105.476 ; 34.259,106.977 34.259,107.508 35.59,108.84 ; 43.19,108.84 43.21,108.84 ; 43.2,108.83 43.21,108.84 ; 45.593,100.131 45.593,107.757 44.51,108.84 43.21,108.84 ; 48.133,100.131 48.133,107.833 v1(48.15,107.85) ; v1(50.45,106.2) 50.673,105.977 50.673,100.131 50.654,100.15 50.6,100.15
  Top Layer w0.5: 12.549,107.602 12.549,107.898 12.549,109.502 ; 13.499,105.402 13.499,105.002 17.653,100.847 17.653,100.131 ; 14.9,109 17.4,109 ; 14.9,109.25 14.9,110 ; 17.4,106.2 19.2,104.4 20.99,104.4 22.89,106.3 ; 17.802,37.153 18.149,37.5 21.35,37.5 21.35,36.175 21.975,35.55 25.15,35.55 25.7,36.1 27.225,36.1 27.825,35.5 27.825,33.075 28.35,32.55 30.794,32.55 32.058,31.286 ; 20.193,100.131 20.193,101.143 25.35,106.3 25.43,106.3 ; v1@21.6,110.55 23.72,110.55 25.43,108.84 ; 22.499,30.07 22.499,27.457 22.512,27.444 ; 22.733,100.131 22.733,100.933 27.97,106.17 27.97,106.3 ; v2(24,39.2) 24.15,39.05 24.15,37.5 ; 25.273,100.131 25.273,100.623 30.51,105.86 30.51,106.3 ; 25.4,27.469 25.413,27.482 25.413,30.095 ; 32.893,100.131 33.05,100.288 33.05,106.3 ; 35.433,100.131 35.433,106.143 35.59,106.3 ; 37.973,100.131 38.13,100.288 38.13,106.3 ; 40.513,100.131 40.67,100.288 40.67,106.3 ; 43.053,100.131 43.21,100.288 43.21,106.3 ; 45.7,38.2 45.78,38.12 ; v1(46.85,40.85) 46.85,42.65 ; 46.862,45.807 53.144,45.807 v1(53.15,45.8) ; 46.862,48.907 47.019,48.75 51.1,48.75 63.52,48.75 63.6,48.83 ; 51.15,34.4 v1(53.45,34.4) 63.57,34.4 63.65,34.48 ; 72.809,50.101 78.809,50.101 80.509,50.101 81.17,50.763 ; 72.95,42.75 72.95,42.707 72.95,40.5 v1(73.05,40.4) ; v1(80.57,48.862) 80.582,48.85 83.5,48.85 84.3,49.65 84.3,49.662 84.3,52.202 84.3,52.24 ; v1@80.72,55.714 80.77,55.659 81.938,54.362 81.938,53.805 ; 81.338,50.955 81.338,51.038 82.9,52.6 82.9,53.38 84.292,54.772 84.3,54.78
  Top Layer w0.6: 46.8,51.7 60.75,51.7 v1(61.05,52)
  Top Layer w1: v1(58.25,110.3) 58.293,110.257 v1(58.293,107.9) 58.293,100.131
  Bottom Layer w0.25: v1(2.25,48.95) 1.8,49.4 1.8,100.2 2.7,101.1 v1(3.15,101.1)
  Bottom Layer w0.3: v2(1.675,101.425) 1.275,101.025 1.275,47.65 v2(1.925,47) ; 2.4,53.213 2.4,56.414 v1@2.4,56.464 ; v1(2.75,95.6) 2.4,95.25 v1@2.4,56.464 ; v1(2.786,56.414) 2.751,56.414 2.701,56.464 v1@2.4,56.464 ; v2(4.002,42.627) 4.002,45.155 6.747,47.9 22.225,47.9 26.425,43.7 v2(26.7,43.7) ; v2(5.325,44.125) 5.325,45.375 6.45,46.5 22.275,46.5 25.1,43.675 25.1,42.7 v2(26.4,41.4) ; 14,64.2 14,75.265 v2(15.004,76.269) ; v2(15.854,87.322) 16.5,86.676 16.5,64.2 ; 16.5,92.7 17.954,91.246 17.954,82.421 v2(17.904,82.371) ; 16.504,78.62 17.404,78.62 v2(17.904,78.12) ; 17.802,29.533 17.802,24.008 v2(18.555,23.256) ; v2(17.954,79.87) 19.105,81.02 19.105,87.972 v2(19.255,88.122) ; v2(24.456,70.268) 24.456,81.67 26.407,83.621 v2(27.207,83.621) ; v2(26.557,34.809) 26.557,34.618 28.625,32.55 30.05,32.55 30.75,31.85 30.75,29.979 29.518,28.746 ; v2(27.057,90.223) 27.057,87.15 28.857,85.35 28.857,77.869 31.258,75.469 v2(31.258,75.119) ; v2@27.557,71.218 v2(27.607,71.218) ; 27.97,108.84 29.25,107.56 29.25,102.8 29.1,102.65 29.1,97.9 29.7,97.3 79.1,97.3 79.95,96.45 79.95,60.65 80.6,60 80.6,55.7 80.653,55.647 80.67,55.664 v1@80.72,55.714 ; v2(32.908,71.618) 32.908,71.718 33.358,72.168 v2(33.358,76.269) ; v2(35.975,78.85) 36.135,78.85 39.16,75.825 39.16,72.568 v2(38.109,71.518) ; 38.13,108.84 39.4,107.57 39.4,105.65 40.15,104.9 49.15,104.9 v1(50.45,106.2) ; 40.6,108.85 40.61,108.84 40.67,108.84 41.933,107.577 47.877,107.577 v1(48.15,107.85) ; v1(41.75,42.65) v1(41.75,54) ; 43.15,106.35 43.2,106.3 43.21,106.3 48.65,106.3 49.85,107.5 51.15,107.5 51.9,106.75 64.8,106.75 70.8,100.75 79.4,100.75 80.75,102.1 85.6,102.1 86.15,101.55 86.15,69.75 80.85,64.45 80.85,60.9 81.75,60 v1(81.75,56.65) ; 43.21,108.84 43.47,109.1 64.95,109.1 71.85,102.2 78.8,102.2 80.3,103.7 86.45,103.7 87.45,102.7 87.7,102.45 87.699,49.45 v1(87.2,48.95) ; v1(58.293,107.9) 64.6,107.9 71.1,101.4 79,101.4 80.3,102.7 86.05,102.7 87,101.75 87,50.8 86.1,49.9 86.1,47.2 87.4,45.9 87.4,31.15 87.2,31.15 v1(87,30.95) ; v1(68.35,42.9) 68.4,42.95 v1(68.4,47.9) ; v1(81.15,34.75) 82.95,34.75 84.3,36.1 v1(84.3,43.55)
  Bottom Layer w0.4: 2.45,53.213 2.45,50.712 3.45,49.713 3.45,49.013 v1(4.001,48.462) ; v1(31.75,103.45) 32.35,104.05 51.834,104.05 55.753,100.131 ; v1(34.25,102.65) 34.75,103.15 50.194,103.15 53.213,100.131 ; v1(86.25,57.764) 86.872,57.764 86.972,57.864
  Bottom Layer w0.5: v1(9.752,110.578) 9.78,110.55 v1@21.6,110.55 ; 15.252,33.343 16.07,32.525 17.35,32.525 17.802,32.073 21.125,28.75 v2(25.4,28.75) 25.413,28.737 v2@25.413,28.7 ; 23.975,28.75 23.975,39.175 v2(24,39.2) ; v2@25.413,28.75 27.2,28.75 27.95,29.5 27.95,30.3 28.936,31.286 29.518,31.286 ; 45.78,25.7 45.78,38.2 45.78,38.93 46.85,40 v1(46.85,40.85) ; v1(53.15,45.8) 53.45,45.5 v1(53.45,34.4) ; 59.98,11.5 59.9,11.58 59.9,24 59.9,50.85 v1(61.05,52) ; v1(73.05,40.4) 74.05,39.4 74.05,38.3 74.05,25.8 ; v1(79.125,39.9) 79.125,47.417 v1(80.57,48.862)
  Bottom Layer w0.6: 54.9,11.5 54.9,24 54.9,24.005
  Bottom Layer w1: 15.113,100.131 15.113,100.713 16.75,102.35 19.4,102.35 22.89,105.84 22.89,106.3 22.89,108.84 22.89,109.64 23.8,110.55 58,110.55 v1(58.25,110.3)
  other v1: 5.451,50.463 70.518,50.463 68.017,52.913 35.509,55.4 30.55,55.414 15.504,55.464 20.45,55.464 25.506,55.5 80.72,55.614 50.45,56.614 60.45,56.614 55.514,56.664 40.51,56.7 45.511,56.764 28.007,57.9 48.062,57.9 58.014,57.9 18.004,57.964 23.006,57.964 33.008,57.964 38.009,57.964 43.011,57.964 53.013,57.964 63.016,57.964 8.102,58.665 8.002,62.966 83.021,69.767 83.021,74.8 83.021,79.9 83.021,84.9 83.05,89.923 5.501,90.473 8.002,92.9 83.021,94.8 70.518,99.025 75.519,99.025 66.017,99.9 63.166,102.3 56.214,102.8 11.903,103.226 16.904,104.3 60.35,104.726 53.55,104.876 83.021,105.426 80.47,107.977 85.471,107.977 67.667,108.5 65.216,110.4 69.967,110.428 78.02,110.428 83.021,110.428 21.6,110.5 60.465,110.5
  other v2: 22.5,28.75 31.097,66.317 27.557,68.367 28.857,84.971
  other v3: 89.95,6.75 89.95,6.751 89.924,6.8 89.95,8.75 89.95,8.751 89.924,8.8 36.15,61.8 38.15,61.8 36.15,95.05 38.15,95.05 89.95,103.2 89.95,103.201 89.874,103.25 89.95,105.2 89.95,105.201 89.874,105.25
  other v4: 26.657,73.018 26.997,78.77

## Polygon pours and split planes (outlines as drawn)
no net on Top Layer (hatched 90Degree grid 0.1 track 0.3, remove dead copper): -1.25,113.875 -1.25,46.061 35.2,46.061 35.2,18.2 -3.75,18.2 -3.75,-2.075 92.05,-2.075 92.05,114.1 -1.25,114.1
no net on Top Layer (hatched 90Degree grid 0.1 track 0.3, remove dead copper): 22.556,90.97 22.556,76.62 20.655,74.796 20.605,74.748 20.605,63.566 40.56,63.566 40.56,93.273 22.556,93.273
GND on Top Layer (hatched 90Degree grid 0.1 track 0.3, remove dead copper): 103.172,55.537 108.603,50.105 111.851,50.105 117.382,55.637 117.382,58.884 112.201,64.065 108.253,64.065 103.172,58.984
+3V3 on Top Layer (hatched 90Degree grid 0.1 track 0.3, remove dead copper): 103.652,58.585 103.652,55.735 108.802,50.585 111.652,50.585 116.902,55.835 116.902,58.685 112.002,63.585 108.452,63.585 103.652,58.785
GND on Top Layer (hatched 90Degree grid 0.1 track 0.3, remove dead copper): 89.022,114.028 89.022,-1.001 180.896,-1.001 180.896,114.128 89.022,114.128
no net on Bottom Layer (hatched 90Degree grid 0.1 track 0.3, remove dead copper): -1.55,113.95 -1.55,49.75 35.125,49.75 35.125,18.5 -2.45,18.5 -2.45,-2.675 90.825,-2.675 90.825,113.7 -1.625,113.7
no net on Bottom Layer (hatched 90Degree grid 0.1 track 0.3, remove dead copper): 40.86,63.566 20.605,63.566 20.605,74.275 22.556,76.091 22.556,93.273 40.81,93.273 40.81,63.612
+3V3 on Bottom Layer (hatched 90Degree grid 0.1 track 0.3, remove dead copper): 108.824,73.55 112.324,73.55 122.324,83.55 122.324,86.7 112.274,96.75 108.974,96.75 99.024,86.8 99.024,83.2 108.624,73.6
GND on Bottom Layer (hatched 90Degree grid 0.1 track 0.3, remove dead copper): 89.723,113.978 89.723,-1.452 180.846,-1.452 180.846,113.677 89.723,113.677

## Keep-outs
Keep-Out Layer:
  circle w0.25: c11.8,121.25 r0
  circle w0.25: c11.8,121.25 r0
  circle w0.25: c11.8,121.25 r0
  circle w0.25: c11.8,121.25 r0
  circle w0.25: c11.8,121.25 r0
  circle w0.25: c11.8,121.25 r0
  circle w0.25: c11.8,121.25 r0
  circle w0.25: c11.8,121.25 r0
  circle w0.25: c12.674,121.3 r0
  circle w0.25: c12.674,121.3 r0
  circle w0.25: c12.674,121.3 r0
  circle w0.25: c12.674,121.3 r0
  circle w0.25: c12.674,121.3 r0
  circle w0.25: c12.674,121.3 r0
  circle w0.25: c12.674,121.3 r0
  circle w0.25: c12.674,121.3 r0
  circle w0.25: c11.8,121.251 r0
  circle w0.25: c11.8,121.251 r0
  circle w0.25: c11.8,121.251 r0
  circle w0.25: c11.8,121.251 r0
  circle w0.25: c11.8,121.251 r0
  circle w0.25: c11.8,121.251 r0
  circle w0.25: c11.8,121.251 r0
  circle w0.25: c11.8,121.251 r0
  lines w0.25: 10.3,60.85 10.35,60.8 ; 10.3,95.4 10.3,96.05 ; 10.3,95.55 10.3,60.8 34.1,60.8 ; 10.35,96.05 34.05,96.05 ; 12.3,62.8 34.35,62.8 ; 12.3,62.9 12.3,64.15 ; 12.3,63.15 12.3,94.05 ; 12.35,94.05 34.2,94.05 ; 18,20.5 33.75,20.5 33.75,10.5 2.25,10.5 2.25,20.5 18.05,20.5 ; 30.2,60.8 78.85,60.8 78.85,96.05 30.3,96.05 ; 34.098,62.809 cw(c34.05,61.85) 34.103,60.891 ; 34.098,96.009 cw(c34.05,95.05) 34.103,94.091 ; 40,62.8 76.5,62.8 76.5,94 ; 40.147,62.809 ccw(c40.2,61.85) 40.152,60.891 ; 40.147,96.009 ccw(c40.2,95.05) 40.152,94.091 ; 40.3,94.05 76.5,94.05 ; 40.7,63.15 40.7,94.05 ; 78.8,60.8 78.85,60.85 ; 88.965,4.798 cw(c89.924,4.75) 90.883,4.803 ; 88.965,10.847 ccw(c89.924,10.9) 90.883,10.852 ; 88.965,101.199 cw(c89.924,101.151) 90.883,101.204 ; 88.965,107.248 ccw(c89.924,107.301) 90.883,107.253 ; 88.991,4.748 cw(c89.95,4.7) 90.909,4.753 ; 88.991,10.797 ccw(c89.95,10.85) 90.909,10.802 ; 88.991,101.198 cw(c89.95,101.15) 90.909,101.203 ; 88.991,107.247 ccw(c89.95,107.3) 90.91,107.252 ; 89,5 89,0 0,0 0,112.4 89,112.4 89,107 ; 89,10.7 89,101.5 ; 90.824,5 90.824,0 179.824,0 179.824,112.45 90.824,112.45 90.824,107.2 ; 90.824,10.6 90.824,101.3 ; 40.3,96.05 40.3,96.05 ; 41.96,96.05 41.96,96.05

## Silkscreen, mask and mechanical layers (free items; w line width, h text height)
Mechanical 1:
  lines w0.25: 146.524,2.86 148.364,4.7 164.824,4.7
  lines w0.3: -2.599,4.7 96.824,4.7 ; 5.95,4.701 8.011,4.701 29.617,26.307 ; 5.951,4.552 8.013,4.552 29.618,26.158 ; 96.774,4.701 98.836,4.701 120.441,26.307
Mechanical 3:
  lines w0.254: 38.045,95.795 38.05,95.8
Mechanical 5:
  circle w0.254: c120.054,6.909 r0.36
  circle w0.254: c120.054,11.909 r0.409
  circle w0.254: c103.35,9.202 r0.311
  circle w0.254: c105,8.002 r0.252
  circle w0.254: c105.801,6.752 r0.352
  circle w0.254: c111.128,2.95 r0.305
  circle w0.254: c111.128,8.001 r0.3
  circle w0.254: c116.529,2.199 r0.3
  circle w0.254: c106.027,2.199 r0.304
  circle w0.254: c103.572,4.7 r0.3
  circle w0.254: c101.472,2.199 r0.3
  circle w0.254: c100.775,8.901 r0.3
  circle w0.254: c121.071,9.401 r0.4
  lines w0.2: 100.725,14.402 121.731,14.402 ; 101.326,-2.552 101.326,10.001 ; 104.026,-0.001 121.481,-0.001 121.531,-0.051

## Text inside footprints (layer, text, board x,y; h text height)
JP1: Top Overlay "10" at 134.877,4.468 h1 r180; Top Overlay "9" at 134.877,7.008 h1 r180; Top Overlay "1" at 148.593,7.008 h1 r180; Top Overlay "2" at 149.101,4.468 h1 r180
JP1_1: Top Overlay "10" at 30.026,37.89 h1.27 r90; Top Overlay "9" at 32.566,37.89 h1.27 r90; Top Overlay "1" at 32.566,24.174 h1.27 r90; Top Overlay "2" at 30.026,23.666 h1.27 r90
JP2: Top Overlay "2" at 120.949,23.767 h1.27 r90; Top Overlay "1" at 123.489,24.275 h1.27 r90; Top Overlay "9" at 123.489,37.991 h1.27 r90; Top Overlay "10" at 120.949,37.991 h1.27 r90
JP5: Top Overlay "2" at 17.81,108.332 h1; Top Overlay "1" at 17.81,105.792 h1; Top Overlay "19" at 44.734,105.792 h1; Top Overlay "20" at 44.734,108.332 h1
JP6: Top Overlay "20" at 135.558,108.332 h1; Top Overlay "19" at 135.558,105.792 h1; Top Overlay "1" at 108.634,105.792 h1; Top Overlay "2" at 108.634,108.332 h1